# Altium PCB WGA_IR_V11.PcbDoc (part 2 of 2)
Units mm, origin at the board's own origin, x right, y up, seen from the top; angles counter-clockwise.
Board outline 80.01 x 83.31 mm, 2 copper layers (Top Layer, Bottom Layer); 107 components, 87 nets, 363 pads, 349 vias.
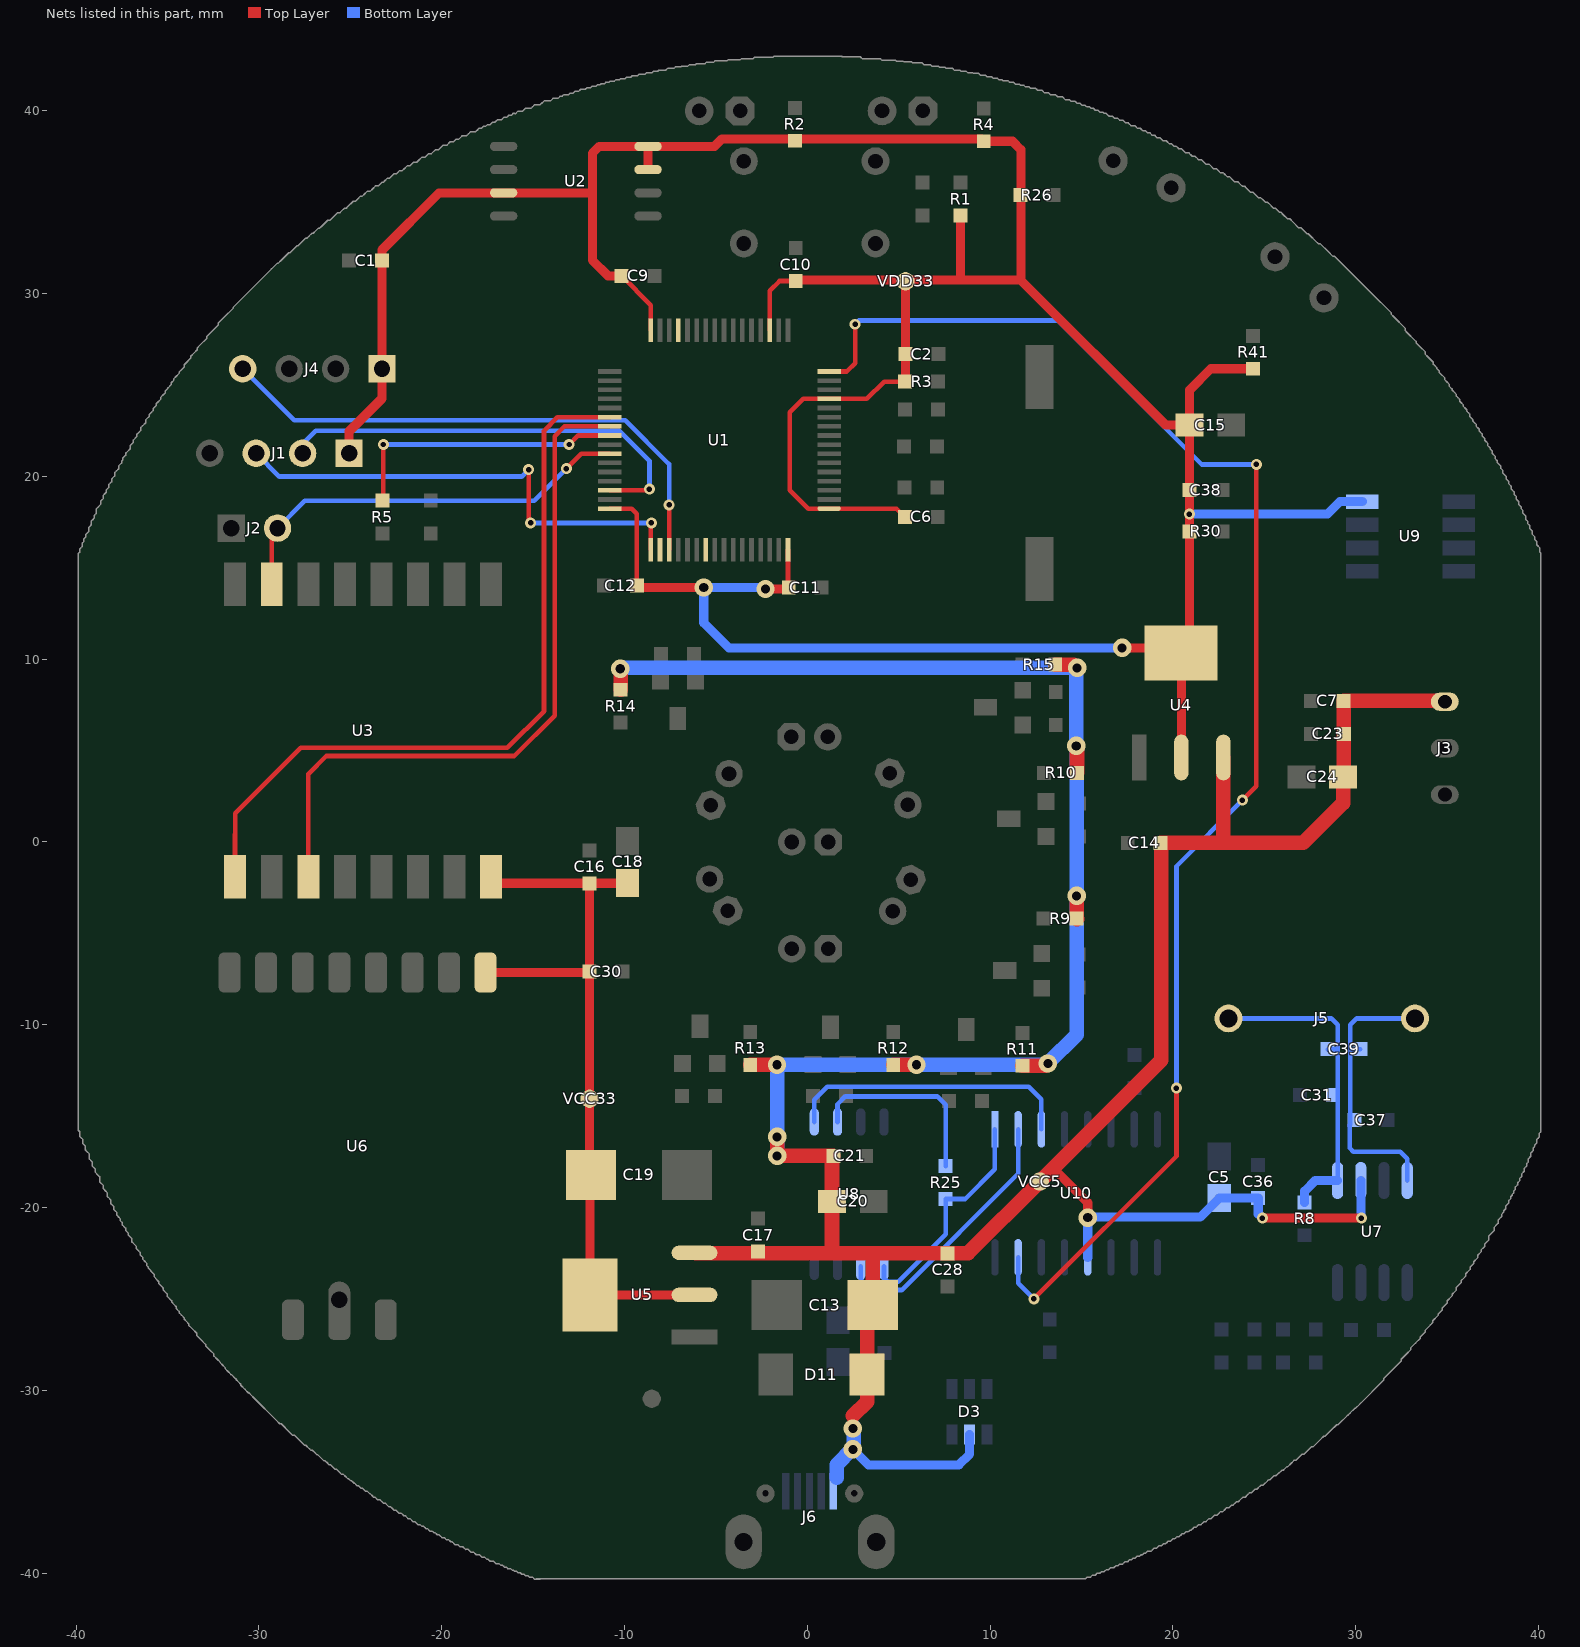
[diagram p2: the nets of this part, all layers, seen from the top]

## Via types
v1: diameter 0.6, hole 0.3, Top Layer to Bottom Layer, tented both sides, 331 vias
v2: diameter 1, hole 0.5, Top Layer to Bottom Layer, tented both sides, 17 vias
v3: diameter 0.6, hole 0.5, Top Layer to Bottom Layer, tented both sides, 1 vias

## Nets (pads, with @x,y where several pads share a name; then routed paths per layer and width w, separated by ;. In a path a pad name is that pad's centre, name@x,y a point inside that pad or via, vN(x,y) a via of type N, cw(c..) or ccw(c..) an arc to the next point about the centre after c; other vN are vias at no path point) (continued)
SPI-CLK: U8.6 U10.2 | length 14.6
  Bottom Layer w0.254: U8.6@2.921,-23.216 2.921,-23.952 3.48,-24.511 5.156,-24.511 11.532,-18.136 U10.2@11.532,-15.723
SPI-CS: U8.1 U10.3 | length 15.9
  Bottom Layer w0.254: U8.1@0.381,-15.316 0.381,-14.097 1.092,-13.386 12.116,-13.386 12.802,-14.072 U10.3@12.802,-15.723
SPI-DI: R25.1 U8.2 | length 10.6
  Bottom Layer w0.254: U8.2@1.651,-15.316 1.651,-14.351 2.083,-13.919 7.112,-13.919 7.569,-14.376 R25.1@7.569,-17.729
SPI-DO: R25.2 U8.5 U10.1 | length 14
  Bottom Layer w0.254: U8.5@4.191,-23.216 4.191,-23.854 4.394,-24.057 4.968,-24.057 7.569,-21.456 R25.2@7.569,-19.529 ; 7.569,-20.828 R25.2@7.569,-19.529 ; U10.1@10.262,-15.723 10.262,-17.907 8.639,-19.529 R25.2@7.569,-19.529
SWCLK: J1.3 U1.49 | length 26.6
  Top Layer w0.254: v1(-15.24,20.371) -15.24,17.551 v1(-15.138,17.45) ; U1.49@-8.556,15.987 v1@-8.556,17.45
  Bottom Layer w0.254: J1.3@-30.15,21.26 -28.88,19.99 -15.621,19.99 v1(-15.24,20.371) ; v1(-15.138,17.45) v1(-8.534,17.45)
SWDIO: J1.2 U1.46 | length 26.4
  Top Layer w0.254: U1.46@-10.806,19.237 v1@-8.636,19.237
  Bottom Layer w0.254: J1.2@-27.61,21.26 -27.61,21.793 -26.899,22.504 -22.479,22.504 ; -24.663,22.504 -22.479,22.504 ; v1(-8.636,19.304) -8.636,20.853 -10.287,22.504 -22.479,22.504
TDI: U1.50
TDO: U1.55
TXD1: J2.2 U1.42 U3.21 | length 23.5
  Top Layer w0.254: U3.21@-29.323,13.335 U3.21@-28.981,13.676 ; U3.21@-29.297,14.097 -29.297,16.855 J2.2@-28.981,17.17 ; v1(-13.184,20.426) -12.373,21.237 U1.42@-10.806,21.237
  Bottom Layer w0.254: J2.2@-28.981,17.17 -27.483,18.669 -14.941,18.669 v1(-13.184,20.426)
TXD2: U1.16 U10.15 | length 82.2
  Top Layer w0.254: U1.16@1.194,25.737 2.166,25.737 2.616,26.187 v1(2.616,28.321) ; v1(12.395,-24.994) 20.193,-17.197 v1(20.193,-13.462) v1@20.041,-13.462 ; v1(23.8,2.286) 24.562,3.048 v1(24.562,20.65)
  Bottom Layer w0.254: v1@2.823,28.527 13.701,28.527 21.578,20.65 v1(24.562,20.65) ; U10.15@11.532,-22.723 11.532,-24.13 v1(12.395,-24.994) ; v1(20.193,-13.462) 20.193,-1.321 v1(23.8,2.286)
TXD3: U1.29
TXD4: J4.4 U1.51 | length 30.1
  Top Layer w0.254: U1.51@-7.556,15.987 v1(-7.556,18.44)
  Bottom Layer w0.254: J4.4@-30.886,25.883 -28.067,23.063 -9.957,23.063 -7.569,20.676 ; v1(-7.556,18.44) -7.556,20.663
VCC5: C5.1 C7.1 C13.1 C14.2 C17.2 C20.1 C21.1 C23.1 C24.1 C28.1 C36.2 D3.5 D11.2 J3.3 J6.1 R9.2 R10.2 R11.2 R12.2 R13.2 R14.2 R15.2 U4.3 U5.3 U7.6 U10.12 VCC5.1 | length 199.8
  Top Layer w0.5: 13.447,-17.846 13.452,-17.846 15.342,-19.736 v2@15.342,-20.523 ; v1(24.892,-20.574) v1(30.302,-20.574)
  Top Layer w0.8: R14.2@-10.211,8.328 v2@-10.211,9.449 ; U5.3@-6.093,-22.504 1.346,-22.504 ; R13.2@-3.124,-12.189 v2(-1.654,-12.189) ; v2(-1.651,-16.129) v2(-1.651,-17.17) C21.1@1.422,-17.17 1.346,-17.247 C20.1@1.346,-19.66 1.346,-22.504 ; 2.489,-31.394 3.273,-30.611 D11.2@3.273,-29.134 3.273,-25.642 C13.1@3.581,-25.334 ; 3.581,-22.606 C13.1@3.581,-25.334 ; C13.1@4.175,-24.74 C13.1@3.581,-25.334 ; R12.2@4.699,-12.189 v2(5.969,-12.189) ; R11.2@11.76,-12.239 v2@13.034,-12.239 ; R15.2@13.56,9.703 v2@14.58,9.703 ; R9.2@14.729,-4.191 v2@14.729,-2.994 ; R9.2@14.754,-4.216 R9.2@14.754,-4.191 ; R10.2@14.754,3.785 v2@14.754,5.21 ; C14.2@19.326,-0.051 C14.2@19.355,-0.051 ; 22.761,0.003 U4.3@22.761,4.623 U4.3@22.761,3.816 ; C24.1@29.312,3.556 29.312,2.134 27.127,-0.051 C14.2@19.355,-0.051 ; C24.1@29.337,3.556 C7.1@29.337,7.722 ; C7.1@29.362,7.722 J3.3@34.874,7.722 ; 1.346,-22.504 8.788,-22.504 VCC5.1@12.717,-18.576 13.447,-17.846 19.355,-11.938 C14.2@19.355,-0.051
  Bottom Layer w0.5: v2@2.464,-33.198 v2(2.489,-33.223) 3.343,-34.077 8.28,-34.077 8.875,-33.482 D3.5@8.875,-32.421 ; U10.12@15.342,-22.723 15.342,-20.523 21.488,-20.523 C5.1@22.53,-19.482 22.533,-19.478 C36.2@24.663,-19.478 24.663,-20.345 v1(24.892,-20.574) ; U7.6@30.277,-18.517 30.277,-20.549 v1(30.302,-20.574)
  Bottom Layer w0.8: v2@-10.236,9.525 v2(14.757,9.525) ; v2(-1.654,-12.189) v2(5.969,-12.189) v2@13.084,-12.189 ; v2(-1.651,-17.17) v2(-1.651,-16.129) v2@-1.651,-12.192 ; J6.1@1.6,-34.773 1.6,-34.061 v2@2.464,-33.198 ; v2(2.489,-33.223) 2.54,-33.172 v2@2.54,-32.004 ; v2(13.157,-12.116) 14.732,-10.541 v2(14.732,-2.946) v2@14.732,5.232 ; v2(14.707,5.258) v2@14.707,9.474
  other v2: 2.489,-32.08 15.342,-20.549 -10.236,9.474
VCC33: C16.1 C18.1 C19.1 C30.1 U3.8 U5.2 U5.4 U6.1 VCC33.1 | length 41.8
  Top Layer w0.5: U6.1@-17.602,-7.137 -11.963,-7.137 C30.1@-11.913,-7.087 ; U3.8@-17.297,-1.903 -16.94,-2.261 C16.1@-11.963,-2.261 ; C16.1@-11.938,-2.286 C16.1@-11.963,-2.261 ; C19.1@-11.887,-18.212 C19.1@-11.887,-18.263 ; C19.1@-11.836,-18.212 C19.1@-11.887,-18.263 ; C18.1@-9.83,-2.057 -10.033,-2.261 C16.1@-11.913,-2.261 ; U5.2@-6.172,-24.776 -11.873,-24.776 U5.4@-11.887,-24.79 C19.1@-11.887,-18.263 ; C16.1@-11.963,-2.261 C16.1@-11.913,-2.261 ; C30.1@-11.913,-7.087 -11.913,-18.237 C19.1@-11.887,-18.263 ; C30.1@-11.913,-7.087 C16.1@-11.913,-2.261
VDD33: C1.1 C2.1 C6.1 C9.1 C10.1 C11.1 C12.1 C15.1 C38.1 J1.1 J4.1 R1.1 R2.2 R3.2 R4.2 R26.2 R30.2 R41.2 U1.1 U1.13 U1.19 U1.32 U1.48 U1.64 U2.3 U2.7 U2.8 U4.2 U4.4 U9.4 VDD33.1 | length 203.5
  Top Layer w0.254: U1.48@-10.806,18.237 -9.601,18.237 -9.322,17.958 C12.1@-9.322,14.021 ; C9.1@-10.16,30.963 -8.556,29.359 U1.32@-8.556,27.987 ; U1.19@-2.056,27.987 -2.056,30.151 -1.524,30.683 C10.1@-0.635,30.683 ; C11.1@-1.056,13.959 U1.64@-1.056,15.987 ; C6.1@5.334,17.78 4.877,18.237 U1.1@1.194,18.237 0.051,18.237 -0.957,19.245 -0.957,23.503 -0.223,24.237 U1.13@1.194,24.237 3.257,24.237 4.204,25.184 R3.2@5.35,25.184 R3.2@5.372,25.206 ; R4.2@9.627,38.357 R4.2@9.652,38.332
  Top Layer w0.5: J1.1@-25.07,21.26 -25.07,22.454 -23.266,24.257 J4.1@-23.266,25.883 -23.266,26.162 C1.1@-23.266,31.801 -23.266,32.385 -20.142,35.509 U2.3@-16.612,35.509 -11.862,35.509 ; -11.76,34.595 -11.76,35.458 ; C9.1@-10.16,30.963 -10.897,30.963 -11.76,31.826 -11.76,35.458 ; C12.1@-9.322,14.021 -9.22,13.919 v2(-5.664,13.919) ; U2.7@-8.712,36.779 U2.8@-8.712,38.049 ; v2(-2.286,13.843) -1.173,13.843 C11.1@-1.056,13.959 ; C10.1@-0.635,30.683 -0.584,30.734 8.458,30.734 ; R3.2@5.372,25.206 C2.1@5.372,26.683 VDD33.1@5.372,30.67 ; R1.1@8.382,34.265 8.382,30.81 8.458,30.734 ; R4.2@9.627,38.357 9.532,38.452 -0.686,38.452 -4.674,38.452 -5.077,38.049 U2.8@-8.712,38.049 ; R4.2@9.652,38.332 11.223,38.332 11.681,37.875 11.681,30.734 ; v2(17.221,10.617) 19.914,10.617 U4.4@20.193,10.338 ; U4.2@20.461,4.623 20.461,10.324 U4.4@20.447,10.338 20.908,10.798 R30.2@20.908,16.993 20.904,16.996 v1(20.904,17.932) C38.1@20.904,19.253 C15.1@20.904,22.809 ; R41.2@24.384,25.886 22.076,25.886 20.904,24.714 C15.1@20.904,22.809 ; -11.76,35.458 -11.76,37.668 -11.379,38.049 U2.8@-8.712,38.049 ; 8.458,30.734 11.681,30.734 ; 11.681,30.734 19.605,22.809 C15.1@20.904,22.809
  Bottom Layer w0.5: v2@-2.286,13.919 v2(-5.664,13.919) -5.664,11.989 -4.293,10.617 v2(17.221,10.617) ; v1(20.904,17.932) 28.448,17.932 29.134,18.618 U9.4@30.353,18.618
VO1: C37.2 C39.1 J5.2 U7.8 | length 15.6
  Bottom Layer w0.254: C37.2@29.667,-15.469 29.667,-16.739 29.87,-16.942 32.436,-16.942 32.817,-17.323 U7.8@32.817,-18.517 ; C37.2@29.693,-15.469 29.693,-11.328 ; C39.1@30.251,-11.328 29.693,-11.328 ; J5.2@33.238,-9.652 30.048,-9.652 29.693,-10.008 29.693,-11.328
VO2: C31.1 C39.2 J5.1 R8.2 U7.5 | length 18.6
  Bottom Layer w0.254: J5.1@23.038,-9.652 28.651,-9.652 29.007,-10.008 29.007,-11.354 ; C39.2@28.477,-11.354 29.007,-11.354 ; U7.5@29.007,-17.729 U7.5@29.007,-18.517 29.007,-11.786 29.007,-11.354
  Bottom Layer w0.5: R8.2@27.203,-19.714 27.203,-19.101 27.788,-18.517 U7.5@29.007,-18.517
WIFI_RESET: U1.38 U3.1 | length 45
  Top Layer w0.254: U3.1@-31.323,-2.667 -31.323,0.427 ; U3.1@-31.297,-1.905 -31.297,1.57 -27.711,5.156 -16.408,5.156 -14.402,7.163 -14.402,22.504 -13.669,23.237 U1.38@-10.806,23.237
WIFI_TERM-ON: U1.39 U3.3 | length 39
  Top Layer w0.254: U3.3@-27.297,-1.905 -27.297,3.716 -26.311,4.702 -16.024,4.702 -13.818,6.909 -13.818,22.203 -13.283,22.737 U1.39@-10.806,22.737
WIFI_UP: R5.1 U1.40 | length 15.7
  Top Layer w0.254: R5.1@-23.241,18.669 -23.19,18.72 v1(-23.19,21.742) ; v1(-13.03,21.742) -12.535,22.237 U1.40@-10.806,22.237
  Bottom Layer w0.254: v1(-23.19,21.742) v1(-13.03,21.742)
pads on no net: J6.4 U1.2 U1.3 U1.4 U1.11 U1.24 U1.37 U1.41 U1.45 U1.53 U1.54 U3.2 U3.4 U3.5 U3.6 U3.7 U3.17 U3.19 U3.20 U9.5 U9.6 U9.7 U9.8 U10.16

## Polygon pours and split planes (outlines as drawn)
GND on Bottom Layer "Mechanical 1-No Net" (solid, remove dead copper, pour order 1000): -32.385,28.092 -32.385,12.192 -32.461,12.116 -32.436,12.09 -32.436,-13.792 -32.487,-13.843 -25.578,-20.752 -20.244,-20.752 -15.037,-27.788 -13.208,-32.36 -9.931,-40.132 15.215,-40.31 15.24,-40.284 24.232,-40.284 24.232,-36.703 31.267,-32.207 40.208,-20.269 40.157,6.401 26.543,12.014 26.543,21.895 34.773,26.187 17.983,42.951 -17.678,42.951 -32.385,28.245 -32.385,28.092 -32.41,28.067 -32.41,26.822
GND on Top Layer "Mechanical 1-No Net" (solid, remove dead copper, pour order 1001): -32.436,28.092 -32.461,28.067 -32.461,-1.854 -32.436,-1.88 -32.487,-1.93 -32.36,-7.239 -16.205,-7.137 -16.205,-19.152 -16.256,-22.479 -16.205,-24.994 -10.16,-39.802 -9.627,-40.259 15.037,-40.361 15.113,-40.284 15.164,-40.335 40.386,-39.624 40.107,6.375 26.391,12.167 26.441,21.692 34.849,26.187 17.831,43.002 -17.653,43.002 -32.461,28.194 -32.461,27.051

## Keep-outs
Keep-Out Layer:
  circle w0.127: c-5.873,-0.01 r0.75
  circle w0.127: c6.127,-0.01 r0.75
  circle w0.127: c18.127,-30.01 r2
  circle w0.127: c-17.873,-30.01 r2
  circle w0.127: c-17.873,29.99 r2
  circle w0.127: c18.127,29.99 r2
  lines w0.127: -39.873,-15.79 ccw(c0.127,-0.01) -14.87,-40.31 15.124,-40.31 ccw(c0.127,-0.01) 40.127,-15.79 40.127,15.77 ccw(c0.127,-0.01) -39.873,15.77 -39.873,-15.79

## Other copper
Top Layer:
  pour cut-out: 10.058,2.083 9.754,2.591 9.55,3.2 9.169,3.2 9.119,3.251 9.5,2.591
  pour cut-out: -0.33,4.597 -0.381,4.597 1.118,4.623 1.118,4.674 1.041,4.75
  pour cut-out: -5.994,3.048 -5.283,4.191 -5.258,4.089 -5.182,4.013
  pour cut-out: -4.013,1.93 -3.556,2.642 -3.302,3.353 -3.632,3.353
  pour cut-out: -4.496,1.067 -4.191,-0.254 -3.556,-2.819 -3.962,-2.819 -4.089,-2.946 -4.623,-0.66
  pour cut-out: 6.883,-2.057 7.417,-0.889 7.976,1.422 7.341,1.346 7.315,1.372
  pour cut-out: 4.928,-0.127 4.242,-2.184 3.886,-2.972 4.115,-2.972 4.623,-1.676
  pour cut-out: 3.659,2.918 4.699,0.864 4.903,-0.01 5.045,-0.01 5.232,0.178
  pour cut-out: 6.927,-2.057 7.112,-1.27 7.351,-0.285 7.351,-0.01 7.128,-0.01 7.087,-0.051
  pour cut-out: 2.203,-16.466 2.203,-15.627 2.21,-15.621 1.956,-15.621
  pour cut-out: -31.115,-8.611 -30.074,-8.687 -30.074,-8.56
  pour cut-out: -28.042,17.348 -28.042,15.113 -28.143,15.011 -28.55,15.418 -29.134,15.418
  pour cut-out: -24.003,18.288 -24.003,15.494 -24.054,15.443 -23.978,15.367 -23.622,15.367
  pour cut-out: -6.629,5.766 -6.579,5.715 -5.359,5.715
  pour cut-out: -5.029,11.024 -5.029,10.897 -5.791,10.135
  pour cut-out: -31.166,12.522 -33.223,12.522 -33.274,12.573 -33.274,12.776
  pour cut-out: -27.102,0.635 -25.984,-0.483 -25.705,-0.483
  pour cut-out: 2.642,-28.931 2.642,-26.492 0.178,-26.492 0.127,-26.441 0.127,-28.296
  pour cut-out: -9.525,7.036 -9.423,7.137 -9.423,7.925 -10.947,7.925 -10.973,7.899 -10.973,7.061
  pour cut-out: -8.585,10.262 -9.22,10.897 -9.22,10.973 -9.017,10.973 -8.89,11.1
  pour cut-out: -7.493,9.093 -6.756,9.093 -6.756,9.373
  pour cut-out: -33.102,-7.137 -16.18,-7.137 -16.18,-26.06 -16.102,-26.137 -33.102,-26.137
  pour cut-out: 13.081,8.001 12.086,8.006 12.086,7.142 12.167,7.061 12.255,7.15 12.738,7.15
  pour cut-out: -1.905,30.607 -3.505,30.607 -3.505,30.429 -3.454,30.378
  pour cut-out: -24.409,24.765 -24.409,23.927 -24.308,23.927 -24.257,23.978
  pour cut-out: -23.419,23.216 -22.174,21.971 -22.174,21.819 -22.276,21.819 -22.403,21.692
  pour cut-out: -21.819,12.04 -21.311,12.548 -21.387,12.548 -21.438,12.598
  pour cut-out: -19.863,12.497 -19.863,11.303 -19.761,11.303 -19.634,11.43
  pour cut-out: 13.665,-8.865 14.122,-8.738 14.275,-8.712 14.199,-8.636 14.199,-8.611
  pour cut-out: 14.757,-2.057 15.799,-2.057 15.799,-2.159
  pour cut-out: 14.021,-4.928 14.072,-5.512 14.122,-5.512 14.173,-5.461 14.224,-5.461
  pour cut-out: 13.894,-0.533 14.199,-0.457 14.199,-0.381
  pour cut-out: 9.779,-6.198 6.502,-6.02 6.655,-6.274 6.68,-6.274
  pour cut-out: -4.877,-38.608 -4.877,-39.04 -5.715,-39.878 -5.69,-39.903 -5.74,-39.903
  pour cut-out: -2.083,-38.608 -1.829,-39.218 -1.499,-39.903 -1.499,-39.878 -1.651,-39.878 -1.956,-39.294
  pour cut-out: 1.651,-39.878 1.803,-39.573 2.362,-38.608 2.54,-38.786 2.54,-38.837
  pour cut-out: 5.131,-38.633 6.299,-39.878 6.172,-40.005 6.071,-40.005
  pour cut-out: -17.882,34.874 -17.831,34.773 -17.653,34.544 -17.602,34.595 -17.526,34.595
  pour cut-out: -15.57,34.569 -15.443,34.646 -15.088,34.874 -15.215,35.001 -15.418,35.001
  pour cut-out: -17.78,36.068 -17.856,38.608 -17.882,38.633 -17.831,38.684 -17.501,38.684
  pour cut-out: -14.605,36.144 -14.605,40.005 -14.935,40.005
  pour cut-out: -9.855,37.465 -9.855,34.214 -9.754,34.112 -9.703,34.163 -9.576,34.163
  pour cut-out: 13.233,21.209 13.233,19.71 13.208,19.685 13.106,19.685
  pour cut-out: 13.868,2.54 14.072,2.464 14.173,2.464 14.275,2.565 14.275,2.616
  pour cut-out: 13.589,4.521 13.589,5.715 13.614,5.69 13.919,5.69
  pour cut-out: 13.868,1.143 13.919,1.168 14.173,1.397 14.224,1.346 14.402,1.346
  pour cut-out: 14.757,6.147 15.773,6.147 15.799,6.121 15.748,6.071 15.748,5.918
  pour cut-out: 12.598,5.563 12.725,5.69 13.03,5.69
  pour cut-out: 12.624,7.239 12.725,7.214 12.852,7.163 12.852,7.061
  pour cut-out: 12.802,10.897 12.802,10.312 12.954,10.312
  pour cut-out: 3.353,9.093 3.353,7.823 3.175,7.823 3.15,7.849
  pour cut-out: -7.036,-0.254 -6.833,-1.118 -6.452,-2.642 -6.299,-2.489
  pour cut-out: -7.366,1.727 -7.188,1.118 -6.96,0.127 -6.706,0.127 -6.528,0.305
  pour cut-out: -7.671,-12.954 -7.645,-13.056 -7.62,-13.208 -7.62,-13.183 -7.595,-13.183 -7.569,-13.157
  pour cut-out: -6.045,-12.852 -6.071,-12.954 -6.096,-13.259 -6.147,-13.259 -6.274,-13.183
  pour cut-out: 6.426,-11.43 6.452,-11.43 6.985,-11.455 6.96,-11.532
  pour cut-out: 6.426,-12.929 7.036,-13.487 7.112,-13.513 7.188,-13.437
  pour cut-out: 13.64,-7.163 14.021,-6.96 14.249,-6.833 14.249,-6.985 14.224,-7.01
  pour cut-out: 13.589,-11.43 15.291,-11.43 15.088,-11.633
  pour cut-out: 12.319,-13.03 12.319,-14.376 12.421,-14.376 12.497,-14.3
  pour cut-out: 11.201,-7.874 11.201,-9.22 11.024,-9.042
  pour cut-out: 9.5,-10.541 9.525,-10.566 11.151,-10.592 11.151,-10.465 10.973,-10.287
  pour cut-out: 8.509,-13.081 8.814,-13.437 8.839,-13.64 8.763,-13.716
  pour cut-out: 1.118,-12.421 1.194,-12.446 1.524,-12.497 1.422,-12.522 1.397,-12.548
  pour cut-out: -24.46,20.168 -24.232,19.507 -23.901,18.771 -23.622,18.796 -23.546,18.872
  pour cut-out: -30.404,17.856 -29.083,17.831 -29.159,17.755 -29.794,17.78 -30.124,17.805
  pour cut-out: -32.893,17.882 -32.868,17.882 -32.639,17.856 -32.639,17.755
  pour cut-out: 13.818,26.035 15.596,26.035 15.596,26.137 15.418,26.314
  pour cut-out: 7.899,22.911 7.874,22.428 7.849,22.377 7.569,22.377
  pour cut-out: -8.89,21.031 -9.017,21.234 -6.35,18.999 -6.604,18.999 -6.604,18.821
  pour cut-out: -12.065,18.872 -11.76,18.872 -11.735,18.898 -11.735,18.974
  pour cut-out: -13.31,12.446 -13.005,12.446 -13.005,12.573
  pour cut-out: -17.729,15.342 -14.757,15.342 -14.732,15.469 -14.732,15.723
  pour cut-out: -28.245,3.861 -27.711,3.683 -27.61,3.785 -27.61,3.886
  pour cut-out: -32.41,2.032 -31.471,2.032 -31.572,1.93 -31.572,1.829
  pour cut-out: -19.939,-5.715 -19.939,-3.404 -19.964,-3.378 -20.295,-3.378
  pour cut-out: -0.279,13.233 -0.279,12.598 -0.229,12.548 -0.279,12.497 -0.533,12.497
  pour cut-out: -19.152,-5.664 -17.907,-5.664 -17.983,-5.74 -17.983,-5.842
  pour cut-out: -13.36,11.684 -12.243,11.684 -12.319,11.76 -12.319,11.938
  pour cut-out: 2.159,22.555 3.073,22.555 2.921,22.403 2.921,22.377
  pour cut-out: -9.804,21.971 -9.804,21.92 -9.144,21.26 -9.195,21.209 -9.373,21.209
  pour cut-out: -7.493,35.89 -7.493,37.465 -7.569,37.541 -7.899,37.541
  pour cut-out: -5.156,37.49 -5.156,36.119 -5.131,36.093 -4.928,36.297 -4.928,36.424
  pour cut-out: -4.47,32.41 -4.978,32.487 -4.851,32.309 -4.775,32.309
  pour cut-out: -3.785,31.648 -3.734,31.217 -3.835,31.293 -3.886,31.293
  pour cut-out: -7.29,31.267 -7.29,32.817 -7.061,32.106 -6.934,32.106
  pour cut-out: 2.946,40.157 2.769,39.014 2.921,39.014
  pour cut-out: 4.191,41.148 5.893,41.148 5.842,41.123 5.817,40.945
  pour cut-out: 10.414,39.37 10.414,39.014 10.389,38.989 10.338,38.989
  pour cut-out: 0.076,39.573 0.102,38.989 -0.025,38.964 -0.152,39.091 -0.356,39.091
  pour cut-out: -5.918,41.148 -4.191,41.148 -4.166,41.123 -4.166,40.97
  pour cut-out: -7.061,40.107 -7.137,38.735 -7.137,38.633 -7.087,38.583 -6.68,38.583
  pour cut-out: -7.01,3.099 -5.766,3.099 -5.766,3.073 -5.994,2.845
  pour cut-out: 2.108,-10.033 2.413,-9.728 2.54,-9.728 2.057,-9.246
  pour cut-out: -19.075,26.467 -19.075,25.095 -18.974,24.994 -18.567,25.4 -18.567,25.451
  pour cut-out: -15.037,27.808 -15.037,26.264 -15.215,26.111 -15.418,26.111
  pour cut-out: -15.596,33.909 -15.596,32.918 -15.672,32.995 -15.672,33.045
  pour cut-out: 1.676,29.286 1.702,29.312 3.531,29.312 3.531,29.286 3.658,29.159
  pour cut-out: 8.407,29.261 8.433,29.286 8.433,30.175 8.687,30.175
  pour cut-out: 25.883,1.753 25.933,1.702 25.933,0.61 25.832,0.61 25.654,0.787
  pour cut-out: 22.86,6.223 22.885,6.248 24.181,6.248 24.181,6.096 24.155,6.071
  pour cut-out: 23.444,20.269 23.317,20.142 24.841,22.073 25.044,21.869 25.044,21.819
  pour cut-out: 6.934,-24.943 6.934,-25.756 7.01,-25.679 7.112,-25.679
  pour cut-out: 8.026,-23.774 8.026,-22.987 8.077,-23.038 8.153,-23.038
  pour cut-out: -1.346,-23.927 -1.346,-23.089 -1.295,-23.038
  pour cut-out: -0.254,-24.638 -0.279,-24.663 -0.279,-25.984 -0.025,-25.984
  pour cut-out: 5.258,-24.028 5.232,-24.003 5.232,-23.038 5.055,-23.038
  pour cut-out: 4.547,-27.889 4.597,-27.838 4.597,-26.924 4.445,-26.924
  pour cut-out: -19.685,16.561 -19.66,16.586 -18.542,16.586 -18.542,16.358
  pour cut-out: -20.955,17.653 -22.073,17.653 -22.073,17.094 -22.123,17.043
  pour cut-out: 13.894,-25.273 13.868,-25.298 12.7,-25.298
  pour cut-out: 32.766,8.382 32.766,10.084 32.791,10.058 33.147,10.058
  pour cut-out: 35.839,7.747 37.109,7.747 37.135,7.772 37.135,7.925
  pour cut-out: 27.559,1.346 27.559,2.743 27.61,2.692 27.864,2.692
  pour cut-out: 17.882,26.492 17.882,25.222 17.577,25.222 17.424,25.375
  pour cut-out: 14.554,29.947 14.478,30.023 12.827,30.023
  pour cut-out: 11.074,32.233 11.074,31.572 10.566,31.064
  pour cut-out: 13.31,27.305 13.36,27.356 13.36,28.448 13.513,28.448 13.665,28.296
Bottom Layer:
  pour cut-out: 2.184,-0.635 1.88,-3.048 1.092,-2.616 0.711,-2.235
  pour cut-out: -0.914,-6.985 -0.889,-7.01 4.166,-7.01 4.166,-6.96 3.988,-6.782
  pour cut-out: -0.508,-4.851 0.711,-3.632 0.737,-3.632 0.737,-3.759 0.914,-3.937
  pour cut-out: -4.699,-0.051 -4.039,-1.676 -3.48,-3.023 -3.683,-3.023 -3.861,-2.845
  pour cut-out: -6.985,-0.305 -6.299,-2.87 -5.055,-4.775 -4.953,-4.674
  pour cut-out: -3.175,3.378 -4.343,0.711 -4.775,-0.432 -5.08,-0.432 -5.156,-0.508 -4.318,1.524
  pour cut-out: -5.283,4.293 -6.706,1.778 -7.087,0.051 -6.579,0.051 -6.452,-0.076
  pour cut-out: 12.7,5.055 13.843,5.055 13.894,5.004
  pour cut-out: 12.903,-2.946 13.31,-3.2 13.97,-3.556 13.995,-3.531 13.995,-3.327
  pour cut-out: 5.664,-4.242 6.477,-3.302 7.036,-1.778 7.366,0.051 7.214,-0.203 7.214,-0.152
  pour cut-out: 3.937,-2.921 4.115,-2.337 5.004,-0.279 5.055,-0.33 5.055,-0.356
  pour cut-out: 5.74,3.886 6.68,2.184 7.29,0.356 7.112,0.356
  pour cut-out: 3.734,2.819 4.394,1.524 5.055,0.305 5.207,0.457 5.334,0.457
  pour cut-out: 4.47,5.004 4.47,5.69 4.572,5.791 4.394,5.791
  pour cut-out: 3.226,3.658 2.388,3.658 2.362,3.683 2.464,3.785 2.464,3.81
  pour cut-out: -0.356,4.597 -0.356,4.572 0.66,3.556 0.838,3.734 0.914,3.734
  pour cut-out: -0.508,6.883 3.912,6.883 4.039,6.756 3.861,6.579 3.683,6.579
  pour cut-out: 3.785,11.227 3.759,11.252 3.759,12.675 3.785,12.675 3.912,12.548
  pour cut-out: 4.039,13.741 4.064,13.767 5.232,13.767 5.105,13.64
  pour cut-out: 19.787,12.141 19.761,12.167 19.761,14.072 19.406,14.072 19.355,14.021
  pour cut-out: 20.066,12.09 20.066,14.046 19.863,14.046 19.787,13.97
  pour cut-out: 20.117,12.09 20.091,12.116 20.091,14.046 19.71,14.046 19.685,14.021
  pour cut-out: -5.131,24.536 -5.055,24.613 -5.055,26.01 -4.877,26.01 -4.851,25.984
  pour cut-out: -2.362,25.984 -2.769,25.984 -4.089,24.663
  pour cut-out: -29.261,21.742 -29.185,21.819 -29.185,23.774 -28.753,23.774
  pour cut-out: -3.251,35.611 -3.251,35.408 -4.166,34.493
  pour cut-out: -33.102,-7.137 -16.129,-7.137 -16.141,-7.149 -16.141,-26.099 -33.063,-26.099 -33.102,-26.137
  pour cut-out: -22.885,10.668 -21.996,10.668 -21.996,10.846
  pour cut-out: -19.863,-9.855 -19.863,-9.982 -20.599,-10.719 -20.523,-10.795 -20.244,-10.795
  pour cut-out: -0.127,-12.929 -0.94,-13.741 -1.067,-13.614 -1.067,-13.03
  pour cut-out: 5.105,-38.76 5.156,-38.633 6.274,-39.878 6.223,-39.929 5.969,-39.929
  pour cut-out: 2.362,-38.659 2.184,-39.091 1.702,-40.03 1.829,-40.056 2.159,-40.056
  pour cut-out: -2.108,-38.608 -1.854,-39.065 -1.321,-39.903 -1.397,-39.98 -1.956,-39.98
  pour cut-out: -4.877,-38.633 -4.877,-39.37 -5.486,-39.98 -5.461,-40.005 -5.512,-40.005
  pour cut-out: -6.299,11.862 -6.299,10.058 -6.248,10.008 -6.121,10.135 -6.02,10.135
  pour cut-out: -12.878,16.993 -12.827,15.138 -12.751,15.113
  pour cut-out: -5.994,18.313 -5.309,17.932 -4.801,17.628 -4.801,17.526 -5.029,17.297
  pour cut-out: 15.621,9.322 16.307,10.008 16.307,10.084 15.824,10.084 15.799,10.109
  pour cut-out: 4.826,37.287 6.858,38.811 6.045,38.837 5.918,38.964
  pour cut-out: 1.397,36.525 1.27,36.5 3.2,36.271 3.2,36.398 2.845,36.754
  pour cut-out: -6.198,38.811 -6.172,38.837 -4.013,38.837 -4.166,38.989
  pour cut-out: -4.496,37.668 -5.055,36.703 -5.232,36.017 -5.283,35.966 -5.004,36.017 -4.953,36.068
  pour cut-out: -2.565,39.522 -2.515,39.472 -2.515,37.77 -2.743,37.77 -3.048,38.075
  pour cut-out: -8.306,31.674 -7.493,31.877 -7.087,32.106 -7.087,31.14 -7.163,31.064
  pour cut-out: -15.977,38.049 -16.027,37.998 -16.027,36.754 -15.9,36.754 -15.85,36.805
  pour cut-out: -30.709,26.975 -28.6,26.975 -28.804,26.772
  pour cut-out: -27.28,25.654 -27.153,25.629 -26.797,25.527 -26.797,25.502 -26.721,25.425
  pour cut-out: -26.111,24.765 -26.111,24.409 -26.137,24.409 -26.213,24.486
  pour cut-out: -29.312,21.996 -28.55,22.758 -28.448,22.758 -28.448,22.682 -28.296,22.53
  pour cut-out: -30.48,18.313 -30.429,18.263 -29.083,18.263 -29.21,18.136
  pour cut-out: -28.829,19.279 -28.981,19.126 -28.981,18.237 -28.753,18.237
  pour cut-out: 4.369,13.411 4.394,13.386 5.537,13.335 5.537,13.208 5.359,13.03
  pour cut-out: -6.248,10.795 -6.248,10.77 -6.756,10.262 -6.706,10.211 -6.553,10.211
  pour cut-out: -3.785,33.833 -3.785,35.281 -3.708,35.357 -3.835,35.484 -4.013,35.484
  pour cut-out: -2.413,37.44 -1.295,36.322 -1.422,36.195 -1.524,36.195
  pour cut-out: -3.759,31.699 -4.115,29.718 -4.318,29.388 -4.369,29.54
  pour cut-out: -4.343,29.286 -4.343,27.711 -4.394,27.661 -4.547,27.813 -4.597,27.813
  pour cut-out: 1.245,28.143 2.565,27.102 2.997,26.848 2.997,27.178 2.946,27.229
  pour cut-out: 8.23,26.924 8.23,27.635 8.382,27.635 8.407,27.61
  pour cut-out: 9.627,26.899 9.627,27.61 9.5,27.61 9.449,27.661
  pour cut-out: 28.6,-9.119 30.404,-9.119 29.743,-9.398
  pour cut-out: 27.686,-10.592 27.686,-10.084 27.788,-10.084
  pour cut-out: 31.039,-10.643 31.039,-10.16 30.734,-10.16 30.683,-10.109
  pour cut-out: 30.709,-15.951 30.709,-16.459 30.505,-16.459
  pour cut-out: 19.736,-21.92 19.71,-21.895 19.71,-21.082 19.533,-21.082
  pour cut-out: 16.688,-17.12 18.821,-17.018 18.618,-16.815 18.618,-16.535
  pour cut-out: 11.963,-17.094 15.164,-17.094 15.189,-17.069 14.808,-16.688 14.808,-16.434
  pour cut-out: -30.505,16.053 -28.854,16.053 -29.134,16.332 -29.261,16.332
  pour cut-out: 10.287,-21.361 13.64,-21.361 13.741,-21.539 13.665,-21.641
  pour cut-out: 10.16,-24.079 10.922,-24.308 11.303,-24.435 11.252,-24.257
  pour cut-out: 2.134,-22.123 6.223,-22.123 6.248,-22.149 6.172,-22.225 6.172,-22.25
  pour cut-out: 0.305,-22.098 1.27,-22.098 1.295,-22.123 1.295,-22.225
  pour cut-out: 0.66,-25.121 0.66,-24.105 0.686,-24.079 0.711,-24.105 0.838,-24.105
  pour cut-out: 4.953,-25.375 4.953,-24.892 4.724,-24.892
  pour cut-out: 24.308,19.228 24.257,19.177 25.806,21.158 25.73,21.234 25.527,21.234
  pour cut-out: 23.546,-20.625 24.13,-20.625 24.155,-20.65 24.181,-20.625 24.181,-20.447
  pour cut-out: 16.027,-18.644 16.053,-18.669 16.053,-20.193 15.723,-20.193 15.697,-20.168
  pour cut-out: 14.376,-21.641 14.376,-20.472 14.605,-20.472 14.656,-20.422
  pour cut-out: 13.868,-20.853 14.656,-20.853 14.656,-20.599
  pour cut-out: 32.512,-22.809 29.616,-22.809 29.515,-22.911
  pour cut-out: 30.328,-22.86 29.54,-22.073 29.515,-22.073 29.362,-22.225
  pour cut-out: 31.877,-19.863 31.902,-19.837 32.715,-19.837 32.715,-19.66
  pour cut-out: 31.242,-19.837 30.785,-19.837 30.785,-19.685
  pour cut-out: 28.931,-19.939 28.981,-19.888 29.896,-19.888
  pour cut-out: 32.334,-26.035 32.334,-25.502 32.41,-25.425 32.512,-25.425 32.512,-25.298 32.41,-25.197 32.385,-25.222 31.953,-25.222 31.953,-25.502 31.902,-25.552 31.902,-25.832
  pour cut-out: 31.217,-25.629 29.235,-25.629 29.235,-25.273
  pour cut-out: 18.644,-27.508 18.644,-24.613 18.872,-24.841 20.015,-24.841
  pour cut-out: 15.367,-24.054 16.256,-24.054 16.307,-24.003 16.307,-23.647
  pour cut-out: 14.376,-24.689 14.376,-25.857 14.351,-25.832 14.3,-25.832
  pour cut-out: 14.453,-21.996 14.453,-20.218 14.427,-20.193 14.529,-20.193
  pour cut-out: 18.237,-24.359 16.967,-24.359 16.891,-24.435 16.891,-24.028
  pour cut-out: 17.348,-14.173 14.427,-14.173 14.376,-14.224 14.376,-14.402
  pour cut-out: 13.894,-13.843 13.081,-13.843 13.03,-13.894 13.03,-14.097
  pour cut-out: 14.097,-13.487 14.097,-12.116 13.97,-12.116
  pour cut-out: 20.015,-13.868 20.015,-14.046 20.676,-14.707
  pour cut-out: 18.669,-14.122 18.669,-14.732 18.491,-14.732 18.44,-14.783
  pour cut-out: 3.861,-16.332 3.81,-16.383 -0.94,-16.383 -0.94,-16.18 -0.965,-16.154
  pour cut-out: 29.312,-19.888 29.286,-19.914 27.838,-19.914 27.838,-19.736 27.813,-19.71
  pour cut-out: 23.419,-27.864 23.444,-27.838 23.444,-27.254 23.292,-27.254 23.241,-27.203
  pour cut-out: 27.076,-27.838 27.026,-27.788 27.026,-27.203 27.153,-27.203 27.229,-27.127
  pour cut-out: 19.837,-10.287 18.39,-10.287 18.39,-10.084 18.491,-9.982
  pour cut-out: 33.833,8.001 33.884,8.052 33.884,9.474 34.392,9.474 34.468,9.398
  pour cut-out: 35.89,7.315 35.763,7.137 37.211,7.747 37.211,7.976 37.084,8.103
  pour cut-out: 17.856,25.552 17.983,25.679 17.983,26.314 17.704,26.314 17.551,26.467
  pour cut-out: 16.281,35.509 17.17,34.62 16.891,34.62

## Silkscreen, mask and mechanical layers (free items; w line width, h text height)
Top Overlay:
  circle w0.254: c-17.906,-30.023 r3.25
  circle w0.254: c18.111,-29.997 r3.25
  circle w0.254: c18.137,29.997 r3.25
  circle w0.254: c-17.88,30.023 r3.25
  circle w0.127: c5.127,39.99 r0.05
  circle w0.127: c5.127,39.99 r1.5
  circle w0.127: c5.127,39.99 r2
  circle w0.127: c-4.873,39.99 r0.05
  circle w0.127: c-4.873,39.99 r1.5
  circle w0.127: c-4.873,39.99 r2
  circle w0.127: c-5.873,-0.01 r0.25
  circle w0.127: c-0.873,-0.01 r0.75
  circle w0.127: c0.127,-0.01 r2.5
  circle w0.127: c1.127,-0.01 r0.75
  circle w0.127: c6.127,-0.01 r0.25
  lines w0.127: -7.88,-1.919 -7.865,-1.945 ; -7.874,1.835 ccw(c-8.402,4) -7.795,1.856 ; -7.787,1.846 -7.88,1.9 -7.865,1.925 ; -6.957,2.27 ccw(c-8.873,4.949) -6.841,2.357 ; -5.53,5.97 -5.545,5.944 ; -5.471,-6.016 ccw(c-7.61,-5.391) -5.45,-5.938 ; -5.437,-5.936 -5.53,-5.989 -5.545,-5.964 ; -2.275,-7.861 cw(c-0.665,-9.401) -2.218,-7.804 ; -2.223,-7.792 -2.223,-7.899 -2.193,-7.899 ; -2.223,7.879 -2.193,7.879 ; 0.627,6.49 cw(c1.127,6.49) 1.627,6.49 ; 0.627,6.579 0.627,4.99 ccw(c1.127,4.99) 1.627,4.99 1.627,6.579 ; 2.472,7.784 ccw(c0.919,9.382) 2.529,7.842 ; 2.477,-7.899 2.447,-7.899 ; 2.477,7.772 2.477,7.879 2.447,7.879 ; 5.691,5.916 5.784,5.97 5.799,5.944 ; 5.704,5.918 cw(c7.864,5.372) 5.725,5.997 ; 5.784,-5.989 5.799,-5.964 ; 6.506,1.941 ccw(c6.256,2.374) 6.006,2.807 4.707,2.057 ccw(c4.957,1.624) 5.207,1.191 6.637,2.017 ; 8.134,-1.919 8.119,-1.945 ; 8.134,1.9 8.119,1.925 ; -7.976,-1.975 -7.976,-1.859 -7.976,1.839 -7.976,1.955 ; -7.976,-1.975 -7.865,-1.945 ; -7.976,-1.975 -5.626,-6.045 ; -7.976,1.955 -5.626,6.025 ; -7.976,1.955 -7.865,1.925 ; -7.865,-1.945 -7.865,-1.866 -7.865,1.846 -7.865,1.925 ; -5.626,-6.045 -5.545,-5.964 ; -5.626,-6.045 -5.526,-6.103 -2.324,-7.952 -2.223,-8.01 ; -5.626,6.025 -5.526,6.083 -2.324,7.932 -2.223,7.99 ; -5.626,6.025 -5.545,5.944 ; -5.545,-5.964 -5.476,-6.003 -2.262,-7.859 -2.193,-7.899 ; -5.545,5.944 -5.476,5.984 -2.262,7.84 -2.193,7.879 ; -2.223,-8.01 -2.193,-7.899 ; -2.223,-8.01 2.477,-8.01 ; -2.223,7.99 2.477,7.99 ; -2.223,7.99 -2.193,7.879 ; 2.447,-7.899 2.477,-8.01 ; 2.447,-7.899 2.516,-7.859 5.73,-6.003 5.799,-5.964 ; 2.447,7.879 2.516,7.84 5.73,5.984 5.799,5.944 ; 2.447,7.879 2.477,7.99 ; 2.477,-8.01 2.578,-7.952 5.78,-6.103 5.88,-6.045 ; 2.477,7.99 2.578,7.932 5.78,6.083 5.88,6.025 ; 5.799,-5.964 5.88,-6.045 ; 5.799,5.944 5.88,6.025 ; 5.88,-6.045 8.23,-1.975 ; 5.88,6.025 8.23,1.955 ; 8.119,-1.945 8.23,-1.975 ; 8.119,-1.945 8.119,-1.866 8.119,1.846 8.119,1.925 ; 8.119,1.925 8.23,1.955 ; 8.23,-1.975 8.23,-1.859 8.23,1.839 8.23,1.955 ; -6.252,-1.961 ccw(c-6.002,-2.394) -5.752,-2.827 -4.453,-2.077 ccw(c-4.703,-1.644) -4.953,-1.211 -6.252,-1.961 ; -6.252,1.941 cw(c-6.002,2.374) -5.752,2.807 -4.453,2.057 cw(c-4.703,1.624) -4.953,1.191 -6.252,1.941 ; -5.252,-3.693 ccw(c-5.002,-4.126) -4.752,-4.559 -3.453,-3.809 ccw(c-3.703,-3.376) -3.953,-2.943 -5.252,-3.693 ; -5.252,3.673 cw(c-5.002,4.106) -4.752,4.539 -3.453,3.789 cw(c-3.703,3.356) -3.953,2.923 -5.252,3.673 ; -1.373,-6.51 ccw(c-0.873,-6.51) -0.373,-6.51 -0.373,-5.01 ccw(c-0.873,-5.01) -1.373,-5.01 -1.373,-6.51 ; -1.373,4.99 ccw(c-0.873,4.99) -0.373,4.99 -0.373,6.49 ccw(c-0.873,6.49) -1.373,6.49 -1.373,4.99 ; 0.627,-6.51 ccw(c1.127,-6.51) 1.627,-6.51 1.627,-5.01 ccw(c1.127,-5.01) 0.627,-5.01 0.627,-6.51 ; 3.707,-3.809 cw(c3.957,-3.376) 4.207,-2.943 5.506,-3.693 cw(c5.256,-4.126) 5.006,-4.559 3.707,-3.809 ; 3.707,3.789 ccw(c3.957,3.356) 4.207,2.923 5.506,3.673 ccw(c5.256,4.106) 5.006,4.539 3.707,3.789 ; 4.707,-2.077 cw(c4.957,-1.644) 5.207,-1.211 6.506,-1.961 cw(c6.256,-2.394) 6.006,-2.827 4.707,-2.077
  text "G" at -26.264,27.584 h1
  text "T" at -30.912,27.559 h1
  text "R" at -28.499,27.559 h1
  text "V" at -25.375,22.962 h1
  text "G" at -33.045,22.936 h1
  text "R" at -32.156,18.694 h0.8
  text "T" at -29.235,18.694 h0.8
  text "WIR_V12" at -36.373,-17.856 h1.6 r90
Bottom Overlay:
  circle w0.127: c0.127,34.99 r1.75
  lines w0.127: -3.323,-41.01 -3.323,-37.51 3.577,-37.51 3.577,-41.01 ; -3.123,-41.01 -3.123,-35.36 ; -2.423,-41.01 -2.423,-40.31 -2.423,-35.36 ; -2.299,-41.01 -2.299,-37.51 ; -1.873,-37.51 -1.873,-40.01 2.127,-40.01 2.127,-37.51 ; 2.553,-41.01 2.553,-37.51 ; 2.677,-41.01 2.677,-40.31 2.677,-35.36 ; 3.377,-41.01 3.377,-35.36 ; -3.623,-41.01 -3.623,-35.36 ; -3.623,-41.01 3.877,-41.01 ; -3.623,-41.01 -3.623,-40.31 -3.623,-35.36 ; -3.623,-35.36 3.877,-35.36 ; 3.877,-41.01 3.877,-35.36 ; 3.877,-41.01 3.877,-40.31 3.877,-35.36 ; -2.873,31.99 3.127,31.99 3.127,37.99 -2.873,37.99 -2.873,31.99
Mechanical 15:
  lines w0.127: -27.446,10.943 -23.196,18.304 -19.905,16.404 -24.155,9.042 -27.446,10.943 ; -4.284,-29.134 4.216,-29.134 4.216,-25.334 -4.284,-25.334 -4.284,-29.134 ; 19.704,16.409 23.954,9.048 27.245,10.948 22.995,18.309 19.704,16.409